# EAGLE board child (EAGLE 9.6.2)
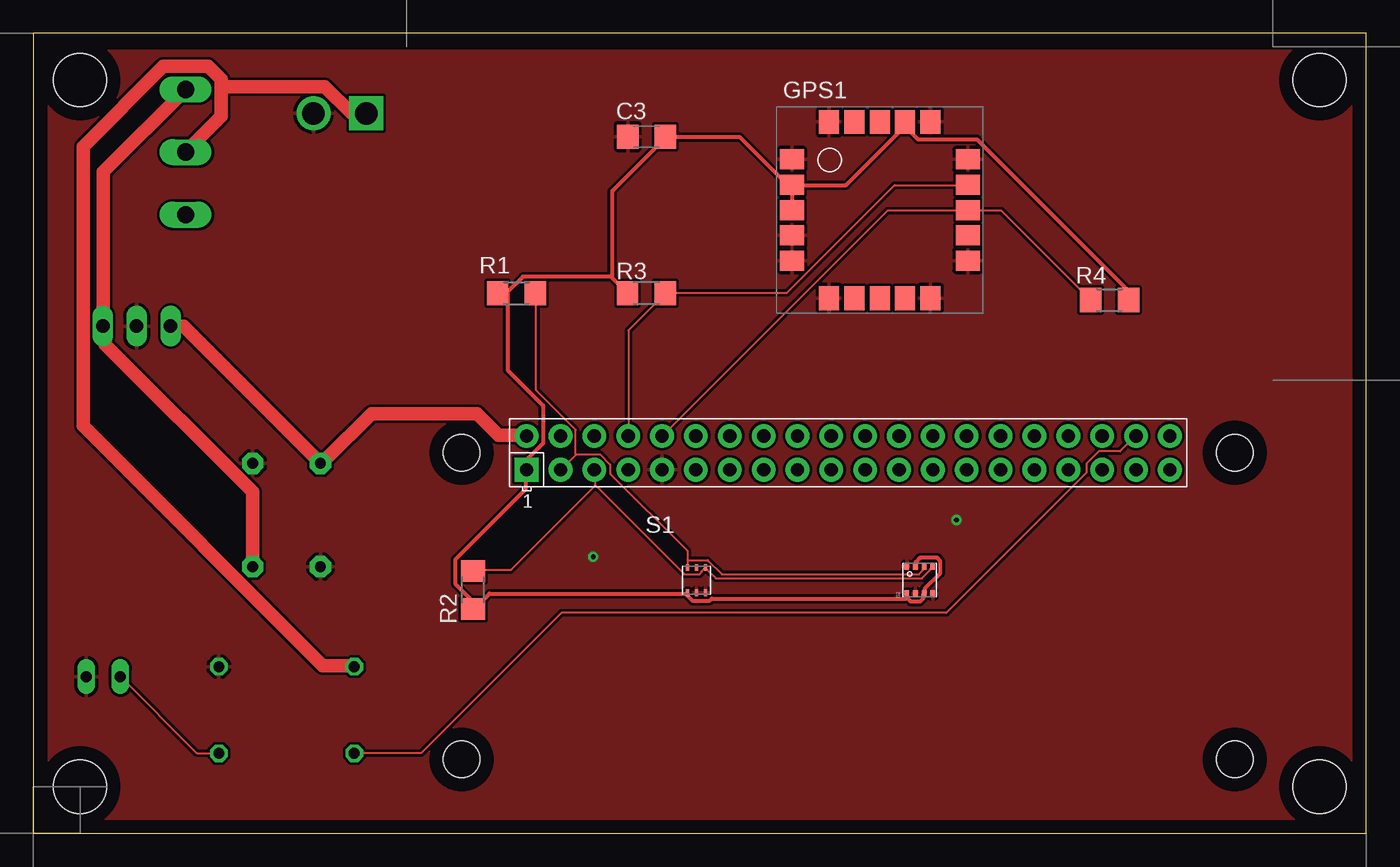
[diagram p0: board, top side]
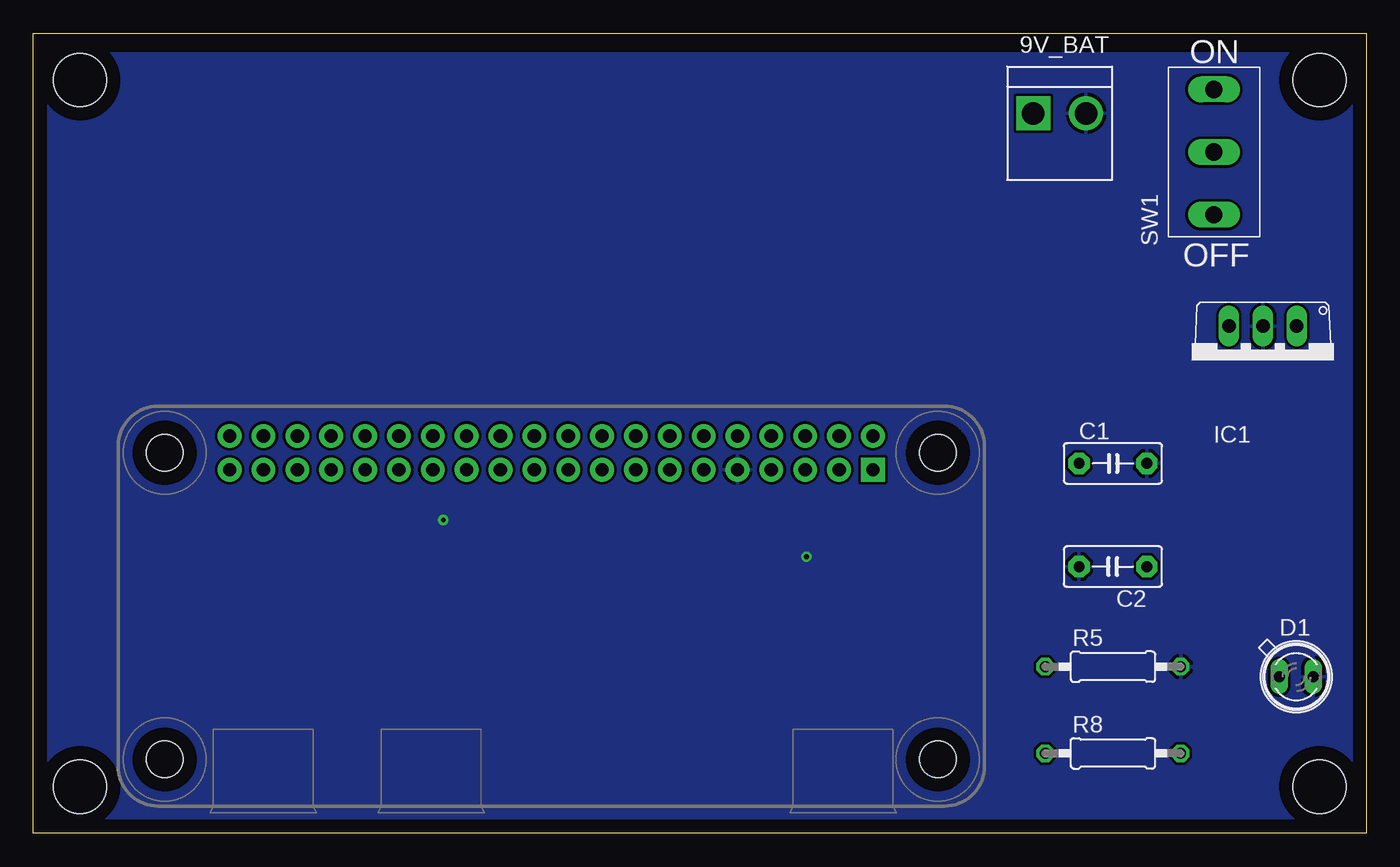
[diagram p1: board, bottom side, seen from below]

Size 100 x 60 mm. Coordinates in mm from the lower left corner, seen from the top.
Outline: 0,0 100,0 100,60 0,60 0,0
Copper layers (1*16): Top 0.035mm / dielectric 1.5mm / Bottom 0.035mm
Design rules "default": minimum track width 6mil, minimum drill 0.35mm, track to track 6mil, track to pad 6mil, pad to pad 6mil, via to via 6mil, smd to smd 6mil, copper to edge 40mil, drill to drill 6mil, minimum pad ring 10mil, minimum via ring 8mil, stop-mask expansion 4mil, vias tented up to drill 0mil, thermal gap 10mil
Net classes: 1 supply: width 1 mm, clearance 0.2 mm; 2 sensor: width 0.3 mm, clearance 0.2 mm
Holes 4 mm at 3.5,56.5 3.5,3.5 96.5,3.5 96.5,56.5
bKeepout: area 28,34 to 93,59

## Footprints (pad centres in the part's own frame; a part is rotated, then mirrored left to right if it is on the bottom)
B2P-VH = drill 1.7 square: 1 -1.98,0 | drill 1.7: 2 1.98,0
C5B3 = drill 0.813 pad 1.6 octagon: 1 -2.54,0; 2 2.54,0
C1206 = smd 1.6 x 1.8: 1 -1.4,0; 2 1.4,0
SFH482 = drill 0.813 long: A -1.27,0; K 1.27,0
SAM-M8Q = smd 1.8 x 1.5: P$1 1.15,11.55; P$2 1.15,9.65; P$3 1.15,7.75; P$4 1.15,5.85; P$5 1.15,3.95; P$11 14.35,3.95; P$12 14.35,5.85; P$13 14.35,7.75; P$14 14.35,9.65; P$15 14.35,11.55 | smd 1.5 x 1.8: P$6 3.95,1.15; P$7 5.85,1.15; P$8 7.75,1.15; P$9 9.65,1.15; P$10 11.55,1.15; P$16 11.55,14.35; P$17 9.65,14.35; P$18 7.75,14.35; P$19 5.85,14.35; P$20 3.95,14.35
TO220V = drill 1.016 long: 1 -2.54,-2.54; 2 0,-2.54; 3 2.54,-2.54
R1206 = smd 1.6 x 1.803: 1 -1.422,0; 2 1.422,0
0207/10 = drill 0.813 octagon: 1 -5.08,0; 2 5.08,0
RASP_PI_ZERO_BOARD_FULL = drill 1 pad 1.778 square: 1 8.37,25.23 | drill 1 pad 1.778: 2 8.37,27.77; 3 10.91,25.23; 4 10.91,27.77; 5 13.45,25.23; 6 13.45,27.77; 7 15.99,25.23; 8 15.99,27.77; 9 18.53,25.23; 10 18.53,27.77; 11 21.07,25.23; 12 21.07,27.77; 13 23.61,25.23; 14 23.61,27.77; 15 26.15,25.23; 16 26.15,27.77; 17 28.69,25.23; 18 28.69,27.77; 19 31.23,25.23; 20 31.23,27.77; 21 33.77,25.23; 22 33.77,27.77; 23 36.31,25.23; 24 36.31,27.77; 25 38.85,25.23; 26 38.85,27.77; 27 41.39,25.23; 28 41.39,27.77; 29 43.93,25.23; 30 43.93,27.77; 31 46.47,25.23; 32 46.47,27.77; 33 49.01,25.23; 34 49.01,27.77; 35 51.55,25.23; 36 51.55,27.77; 37 54.09,25.23; 38 54.09,27.77; 39 56.63,25.23; 40 56.63,27.77 | hole 2.75: 3.5,3.5; 3.5,26.5; 61.5,3.5; 61.5,26.5
OPT3002 = smd 0.5 x 0.25: P$1 -0.95,0.675; P$2 -0.95,0; P$3 -0.95,-0.675; P$4 0.95,-0.675; P$5 0.95,0; P$6 0.95,0.675
BME280 = smd 0.5 x 0.35: P$1 2.275,2.225; P$2 2.275,1.575; P$3 2.275,0.925; P$4 2.275,0.275; P$5 0.225,0.275; P$6 0.225,0.925; P$7 0.225,1.575; P$8 0.225,2.225
TOGGLE_1MS1-T1-B1-M2-Q-N-S = drill 1.3 long: P$1 1.65,3.43; P$2 6.35,3.43; P$3 11.05,3.43

## Placement (x,y rotation side)
9V_BAT  [B2P-VH]  23,54 0 bottom
C1  33u  [C5B3]  19,27.75 0 bottom
C2  0.33u  [C5B3]  19,20 180 bottom
C3  0.1u  [C1206]  46,52.25 0 top
D1  SFH482  [SFH482]  5.25,11.75 0 bottom
GPS1  SAM-M8Q  [SAM-M8Q]  55.75,39 0 top
IC1  7805TV  [TO220V]  7.75,35.5 180 bottom
R1  10k  [R1206]  36.25,40.5 180 top
R2  10k  [R1206]  33,18.25 270 top
R3  10k  [R1206]  46,40.5 0 top
R4  10k  [R1206]  80.75,40 180 top
R5  1M  [0207/10]  19,12.5 0 bottom
R8  470  [0207/10]  19,6 0 bottom
RPI_ZERO1  RPI-ZERO  [RASP_PI_ZERO_BOARD_FULL]  28.64,2.04 0 top
S1  OPT3002  [OPT3002]  49.75,19 90 top
S2  BME280  [BME280]  67.75,17.75 90 top
SW1  TOGGLE  [TOGGLE_1MS1-T1-B1-M2-Q-N-S]  8,44.75 90 bottom

## Library data of the parts
9V_BAT = CONN_VH
C1 C2 = capacitor-wima
C3 = rcl; SPICEPREFIX: C
D1 = led
GPS1 = GPS
IC1 = linear
R1-R5 R8 = rcl; SPICEPREFIX: R
RPI_ZERO1 = RaspberryPi_Zero
S1 = OPT3002
S2 = BME280
SW1 = switch

## Nets
+3V3 [sensor]: C3.2 GPS1.P$2 GPS1.P$3 GPS1.P$17 R1.2 R2.2 R3.1 R4.1 RPI_ZERO1.1 S1.P$1 S2.P$2 S2.P$6 S2.P$8
+5V [supply]: C1.1 IC1.3 RPI_ZERO1.2
GND [supply]: 9V_BAT.2 C1.2 C2.2 C3.1 D1.K GPS1.P$1 GPS1.P$4 GPS1.P$5 GPS1.P$6 GPS1.P$10 GPS1.P$11 GPS1.P$15 GPS1.P$16 GPS1.P$20 IC1.2 R5.2 RPI_ZERO1.9 S1.P$2 S1.P$3 S2.P$1 S2.P$5 S2.P$7
GPS_RXD: GPS1.P$14 R3.2 RPI_ZERO1.8
GPS_TXD: GPS1.P$13 R4.2 RPI_ZERO1.10
N$1: R8.1 RPI_ZERO1.38
N$2: D1.A R8.2
SCL: R2.1 RPI_ZERO1.5 S1.P$4 S2.P$4
SDA: R1.1 RPI_ZERO1.3 S1.P$6 S2.P$3
V+ [supply]: 9V_BAT.1 R5.1 SW1.P$2
VIN [supply]: C2.1 IC1.1 SW1.P$3

## Tracks (layer width: path | path; a pad name or v marks a point on that pad's centre or on a via)
+3V3
  Top 0.3: 65.53,17.68 65.53,17.91 S2.P$8 | 65.53,17.68 65.84,17.37 66.52,17.37 66.75,17.6 66.75,17.91 S2.P$6 66.9,18.06 66.9,18.36 68.05,19.51 68.05,20.42 67.82,20.65 66.52,20.65 66.22,20.34 66.22,20.04 S2.P$2 | 65.53,17.68 65.46,17.6 50.9,17.6 50.75,17.45 49.45,17.45 49,17.91 S1.P$1 49.07,17.98 34.21,17.98 33.07,16.84 R2.2 33.22,17.14 31.7,18.67 31.7,20.57 36.96,25.83 36.96,27.2 RPI_ZERO1.1 37.11,27.36 37.11,28.12 38.25,29.26 38.25,32.08 35.59,34.75 35.59,40.46 R1.2 34.9,40.54 35.51,40.54 36.73,41.76 43.36,41.76 | 43.36,41.76 44.58,40.54 R3.1 | GPS1.P$3 56.92,46.79 56.92,48.62 GPS1.P$2 | GPS1.P$2 56.77,48.69 56.54,48.69 53.03,52.2 47.47,52.2 C3.2 47.4,52.12 43.43,48.16 43.43,41.83 43.36,41.76 | GPS1.P$2 57.07,48.62 60.96,48.62 65.38,53.03 65.38,53.34 GPS1.P$17 65.46,52.96 66.37,52.05 70.79,52.05 82.14,40.69 82.14,40.01 R4.1
+5V
  Top 1: IC1.3 10.36,38.02 11.28,38.02 21.49,27.81 C1.1 21.95,28.04 25.38,31.47 33.3,31.47 34.9,29.87 36.96,29.87 RPI_ZERO1.2
GND  (via drill 0.35)
  other vias: 69.25,23.5 42,20.75
  pour Top: 1,58.75 99.25,58.75 99.25,0.75 1,0.75
  pour Bottom: 1.75,58.5 99,58.5 99,0.5 1,0.5 1,58.75
GPS_RXD
  Top 0.152: GPS1.P$14 70.03,48.62 64.62,48.62 56.54,40.54 47.47,40.54 R3.2 47.4,40.46 44.65,37.72 44.65,29.87 RPI_ZERO1.8
GPS_TXD
  Top 0.152: R4.2 72.62,46.71 70.1,46.71 GPS1.P$13 70.03,46.71 64.08,46.71 47.24,29.87 RPI_ZERO1.10
N$1
  Top 0.152: R8.1 24.16,6.02 29.11,6.02 39.62,16.54 68.5,16.54 79.02,27.05 79.02,27.74 79.93,28.65 81.53,28.65 82.68,29.79 RPI_ZERO1.38
N$2
  Top 0.152: R8.2 13.87,6.02 12.27,6.02 6.55,11.73 D1.A
SCL
  Top 0.152: 42.18,26.1 42.14,26.14 42.14,27.2 RPI_ZERO1.5 | 42.18,26.1 48.84,19.43 49.99,19.43 50.14,19.58 50.14,19.66 50.37,19.89 S1.P$4 50.44,19.89 51.21,19.13 66.67,19.13 67.28,19.74 67.28,19.81 67.44,19.96 S2.P$4 | 42.18,26.1 35.81,19.74 33.07,19.74 R2.1
SDA
  Top 0.152: 49.07,20.5 49.07,21.18 43.28,26.98 43.28,27.66 42.52,28.42 40.77,28.42 40.73,28.38 | 49.07,20.5 49.07,19.96 S1.P$6 | 40.73,28.38 39.62,27.28 RPI_ZERO1.3 | 49.07,20.5 50.6,20.5 51.66,19.43 66.45,19.43 66.75,19.74 66.75,19.96 S2.P$3 | R1.1 37.72,40.46 37.72,33.22 40.69,30.25 40.69,28.42 40.73,28.38
V+
  Top 1: 14.1,56.01 14.1,53.8 11.43,51.13 SW1.P$2 | 14.1,56.01 14.1,56.54 13.11,57.53 9.75,57.53 3.73,51.51 3.73,30.56 21.72,12.57 24.08,12.57 R5.1 | 14.1,56.01 21.87,56.01 23.85,54.03 24.92,54.03 9V_BAT.1
VIN
  Top 1: SW1.P$3 11.43,55.78 5.26,49.61 5.26,38.1 IC1.1 5.41,37.57 5.41,36.65 16.46,25.6 16.46,20.04 C2.1

## Text on the board
bPlace: ON | OFF